# EAGLE board T10_Receiver (EAGLE 7.2.0)
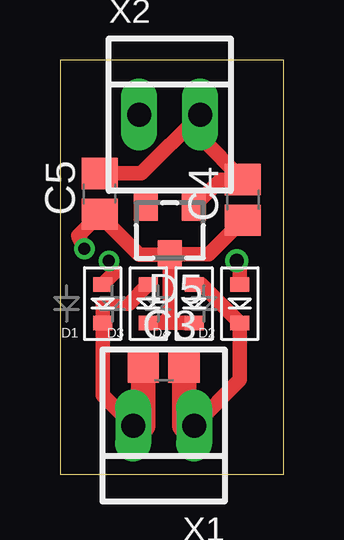
[diagram p0: board, top side]
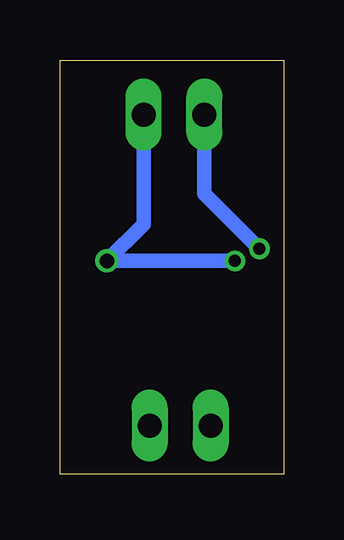
[diagram p1: board, bottom side, seen from below]

Size 9.32 x 17.26 mm. Coordinates in mm from the lower left corner, seen from the top.
Outline: 0,0 9.32,0 9.32,17.26 0,17.26 0,0
Copper layers (1*16): Top 0.0356mm / dielectric 1.5011mm / Bottom 0.0356mm
Design rules "OSHParkDRC": minimum track width 6mil, minimum drill 13mil, track to track 6mil, track to pad 6mil, pad to pad 6mil, via to via 6mil, smd to smd 6mil, copper to edge 15mil, drill to drill 6mil, minimum pad ring 7mil, minimum via ring 7mil, stop-mask expansion 3mil, vias tented up to drill 0mil, thermal gap 10mil

## Footprints (pad centres in the part's own frame; a part is rotated, then mirrored left to right if it is on the bottom)
C0805 = smd 1.3 x 1.5: 1 -0.85,0; 2 0.85,0
SOD-523 = smd 0.8 x 0.6: A 0,-0.8; K 0,0.8
TO236 = smd 1 x 1.2: A -1,-1; C 0,1; NC 1,-1
22-23-2021 = drill 1 long: 1 -1.27,0; 2 1.27,0

## Placement (x,y rotation side)
C3  [C0805]  4.32,4.57 0 top
C4  [C0805]  7.62,11.43 90 top
C5  [C0805]  1.65,11.68 90 top
D1  DFLS230LQ-7  [SOD-523]  1.78,7.11 180 top
D2  DFLS230LQ-7  [SOD-523]  7.49,7.11 180 top
D3  DFLS230LQ-7  [SOD-523]  3.68,7.11 180 top
D4  DFLS230LQ-7  [SOD-523]  5.59,7.11 180 top
D5  5.1V  [TO236]  4.57,10.16 180 top
X1  22-23-2021  [22-23-2021]  4.32,2.03 180 top
X2  22-23-2021  [22-23-2021]  4.57,14.99 0 top

## Library data of the parts
C3-C5 D1-D4 = adafruit
D5 = diode
X1 X2 = con-molex; MF: MOLEX; MPN: 22-23-2021; OC_FARNELL: 1462926; OC_NEWARK: 25C3832

## Nets
N$1: C3.1 D1.K D3.A X1.2
N$2: C3.2 D2.K D4.A X1.1
N$3: C4.2 C5.2 D1.A D2.A D5.A X2.2
N$4: C4.1 C5.1 D3.K D4.K D5.C X2.1

## Tracks (layer width: path | path; a pad name or v marks a point on that pad's centre or on a via)
N$1
  Top 0.61: X1.2 1.78,3.3 D1.K 1.78,7.11 2.88,7.11 D3.A
  Top 1.016: X1.2 3.47,2.03 C3.1
N$2
  Top 0.61: X1.1 7.49,3.94 D2.K 5.89,7.91 D4.A
  Top 1.016: X1.1 5.17,2.03 C3.2
N$3  (via drill 0.5, 0.6)
  Top 0.61: C5.2 3.39,12.53 X2.2 5.84,14.06 C4.2 6.69,12.28 D5.A | D2.A 7.49,8.76 v7.37,8.89 | D1.A 2.29,8.42 v2.03,8.89
  Bottom 0.61: X2.2 5.84,10.41 v7.37,8.89 v2.03,8.89
N$4  (via drill 0.5)
  Top 0.61: D3.K 4.32,6.31 | 4.32,6.31 D4.K | D5.C 4.57,6.57 4.32,6.31 | D5.C 6.2,9.16 C4.1 | D5.C 4.56,9.14 3.3,9.14 1.65,10.8 C5.1 0.76,9.95 v1.02,9.4
  Bottom 0.61: v1.02,9.4 3.3,11.68 X2.1